# Altium PCB Switchboard V1.PcbDoc
Units mil, origin at the board's own origin, x right, y up, seen from the top; angles counter-clockwise.
Board outline 3833.63 x 7047.24 mil, 2 copper layers (Top Layer, Bottom Layer); 109 components, 103 nets, 516 pads, 2 vias.
Unrouted connection lines stored in the file: 193.
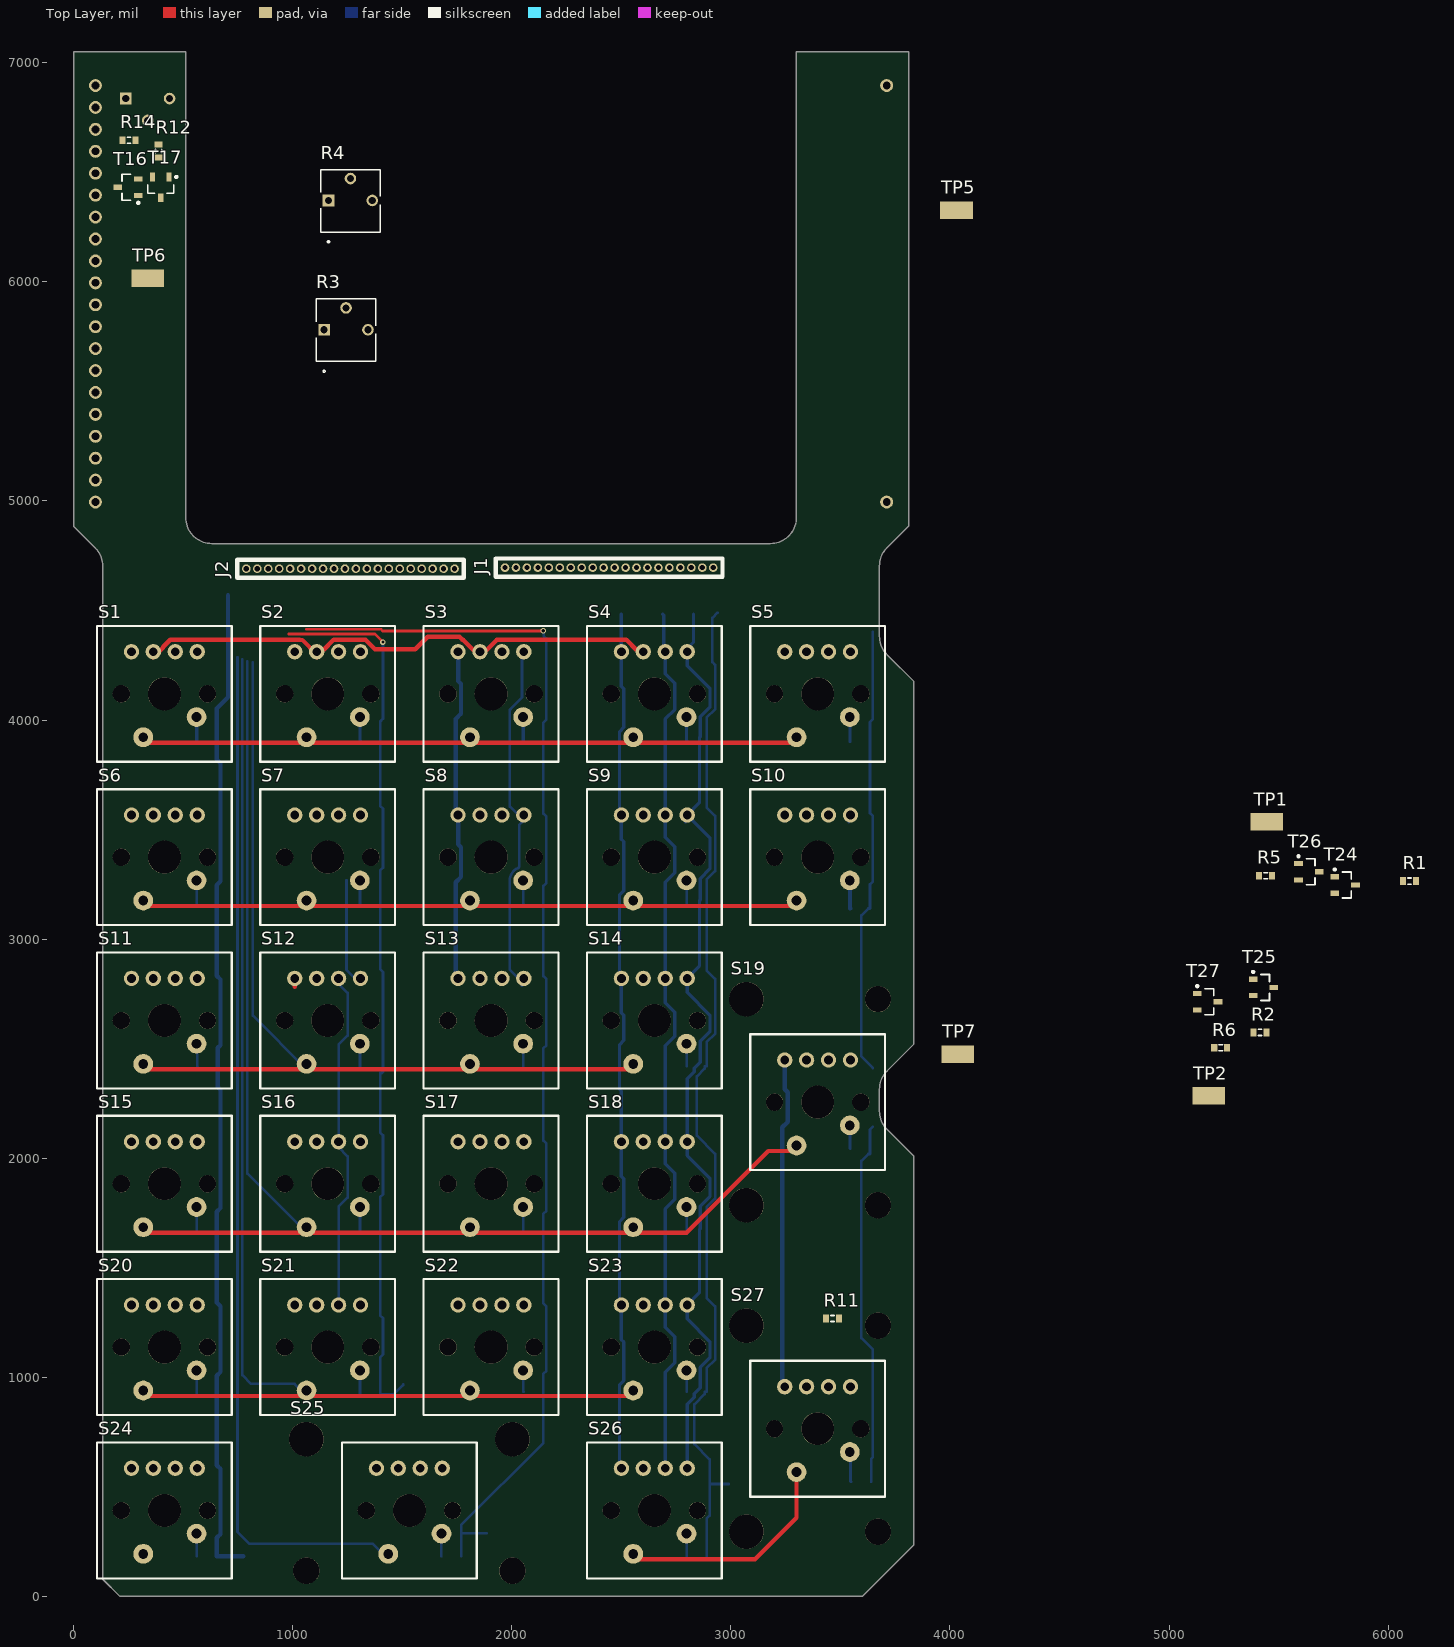
[diagram p0: Top Layer view]
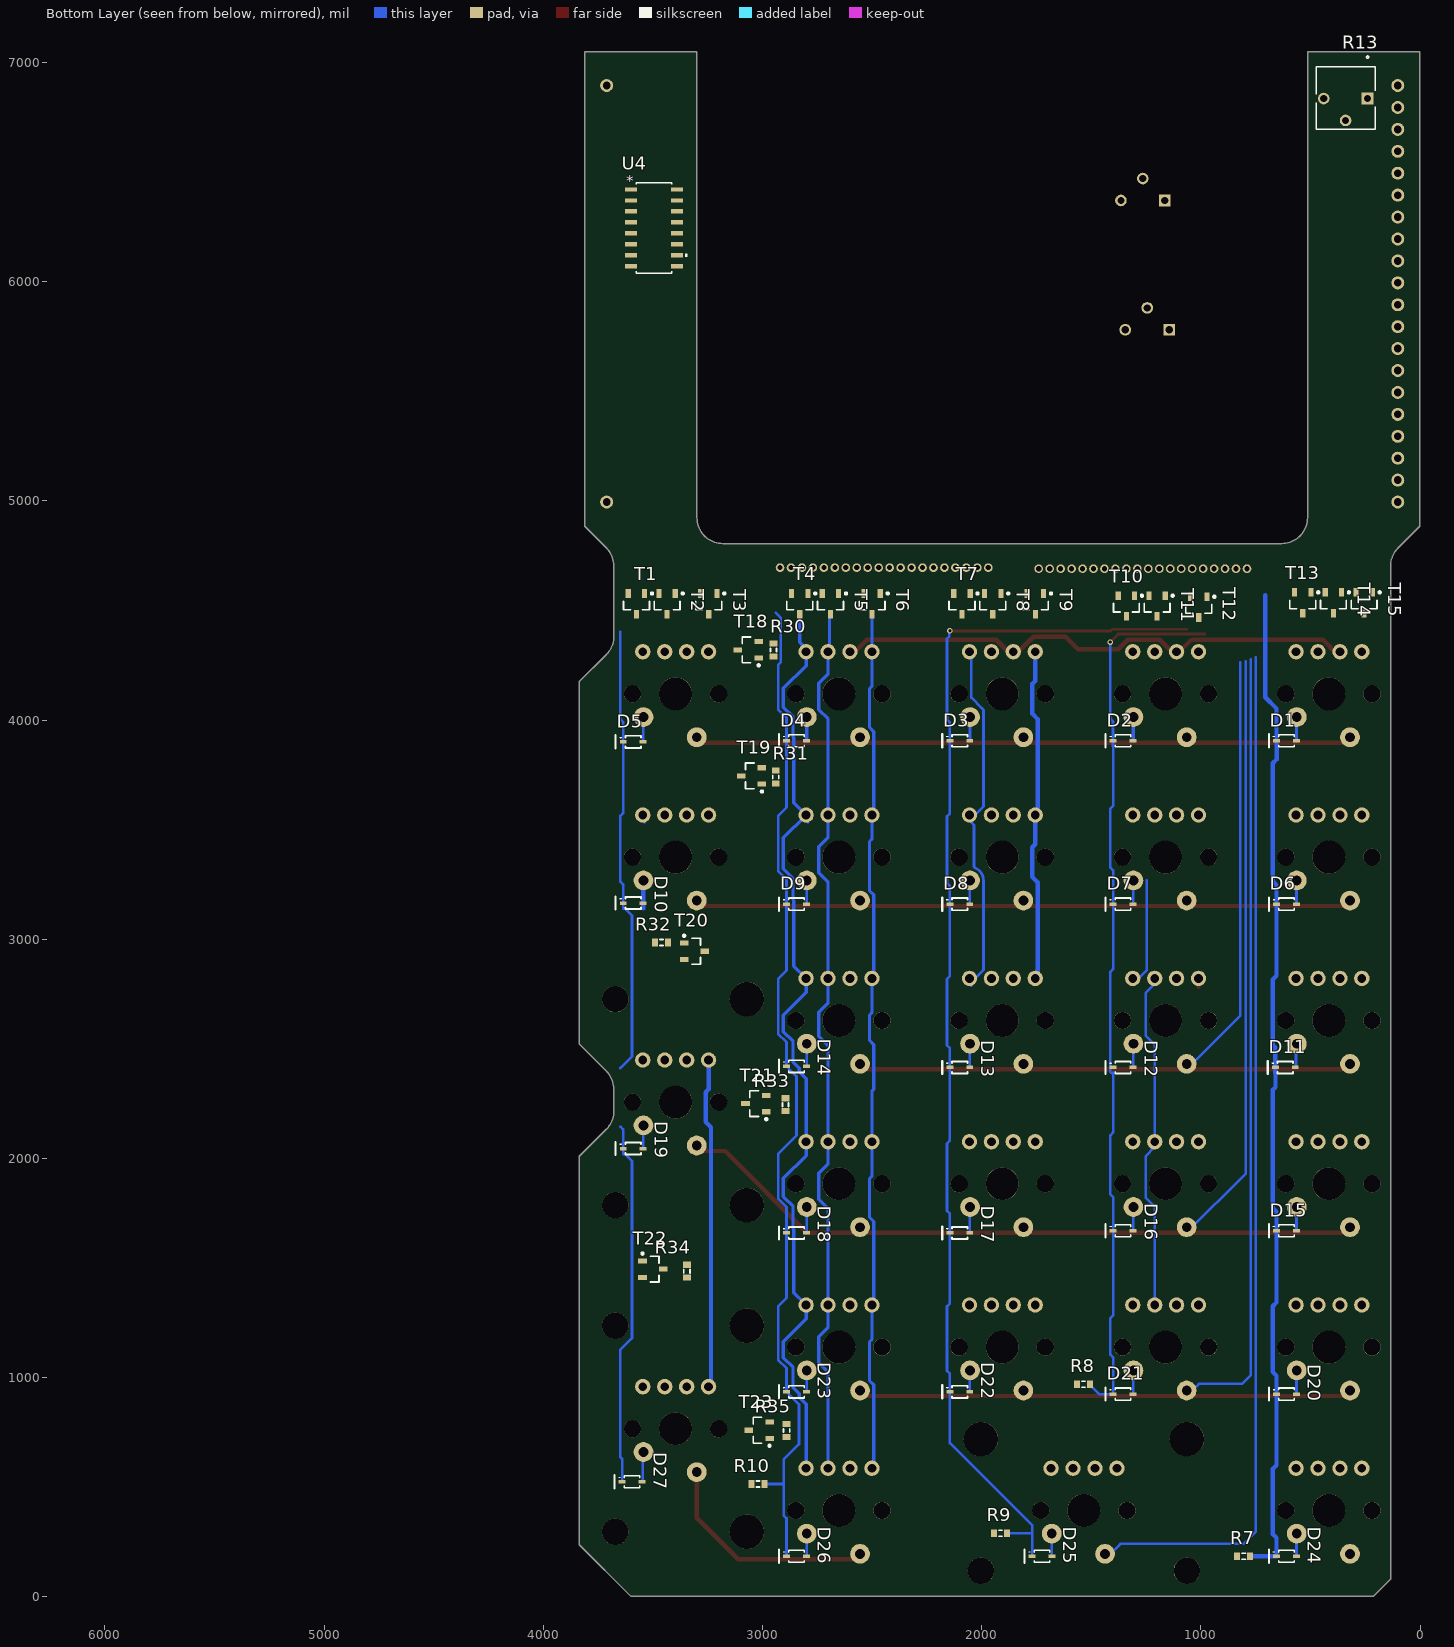
[diagram p1: Bottom Layer view, seen from below]

## Layer stack, top to bottom
Top Solder: solder mask 0.4, Solder Resist, Dk 3.5
Top Layer: signal copper 1.4
Dielectric 1: dielectric 12.6, FR-4, Dk 4.8
Bottom Layer: signal copper 1.4
Bottom Solder: solder mask 0.4, Solder Resist, Dk 3.5

## Board outline
134.81,80.71 134.81,4702.09 ccw(c16.7,4702.09) 100.22,4785.61 1.97,4883.86 1.97,7049.21 513.78,7049.21 513.78,4923.23 ccw(c631.89,4923.23) 631.89,4805.12 3181.05,4805.12 ccw(c3181.05,4923.23) 3299.16,4923.23 3299.16,7049.21 3810.97,7049.21 3810.97,4883.86 3712.72,4785.61 ccw(c3796.23,4702.09) 3678.12,4702.09 3678.12,4381.6 ccw(c3796.23,4381.6) 3712.72,4298.08 3835.6,4175.2 3835.6,2521.65 3712.72,2398.77 ccw(c3796.23,2315.25) 3678.12,2315.25 3678.12,2216.25 ccw(c3796.23,2216.25) 3712.72,2132.73 3835.6,2009.84 3835.6,238.19 3599.38,1.97 213.56,1.97

## Design rules (kind name [scope] priority, off if disabled: settings)
Clearance [All] p1: gap=10 ignorepadtopadclearanceinfootprint=FALSE except(0: Arc-Hole Track-Hole SMDPad-Hole THPad-Hole Via-Hole Fill-Hole Poly-Hole Region-Hole Text-Hole)
PolygonConnect [All] p1: connectstyle=Relief reliefconductorwidth=10 reliefentries=4 polygonreliefangle="90 Angle" airgapwidth=10
RoutingVias [All] p1: holewidth=15 width=25 viastyle="Through Hole" minholewidth=10 minwidth=20 maxholewidth=30 maxwidth=50
SolderMaskExpansion [All] p1: expansion=4 istentingtop=FALSE
Width [All] p1: maxlimit=100 minlimit=6 preferedwidth=10
30 further rules are at their usual default settings.

## Classes and differential pairs
net class "LED Red Ca[4..0]": "LED Red Ca0" "LED Red Ca1" "LED Red Ca2" "LED Red Ca3" "LED Red Ca4"
net class "LED Green Ca[4..0]": "LED Green Ca0" "LED Green Ca1" "LED Green Ca2" "LED Green Ca3" "LED Green Ca4"
net class "LED Blue Ca[4..0]": "LED Blue Ca0" "LED Blue Ca1" "LED Blue Ca2" "LED Blue Ca3" "LED Blue Ca4"
net class SWL[4..0]: SWL0 SWL1 SWL2 SWL3 SWL4
net class SWH[5..0]: SWH0 SWH1 SWH2 SWH3 SWH4 SWH5
net class LS[14..0]: LS0 LS1 LS2 LS3 LS4 LS5 LS6 LS7 LS8 LS9 LS10 LS11 LS12 LS13 LS14
net class "LED An[5..0]": "LED An0" "LED An1" "LED An2" "LED An3" "LED An4" "LED An5"
net class HS[5..0]: HS0 HS1 HS2 HS3 HS4 HS5
net class AHS[2..0]: AHS0 AHS1 AHS2
component class Connectors: J1 J2

## Components (designator, comment, footprint, x,y, rotation, side; value= is the part's Value field where it differs from the comment)
D1 "C2128 Diode" "C2128 SOD323" 610,3905.09 r180 bottom locked
D2 "C2128 Diode" "C2128 SOD323" 1355,3905.09 r180 bottom locked
D3 "C2128 Diode" "C2128 SOD323" 2100,3905.09 r180 bottom locked
D4 "C2128 Diode" "C2128 SOD323" 2845,3905.09 r180 bottom locked
D5 "C2128 Diode" "C2128 SOD323" 3590,3900.09 r180 bottom locked
D6 "C2128 Diode" "C2128 SOD323" 610,3160.09 r180 bottom locked
D7 "C2128 Diode" "C2128 SOD323" 1355,3160.09 r180 bottom locked
D8 "C2128 Diode" "C2128 SOD323" 2100,3160.09 r180 bottom locked
D9 "C2128 Diode" "C2128 SOD323" 2845,3160.09 r180 bottom locked
D10 "C2128 Diode" "C2128 SOD323" 3590,3165.09 r180 bottom locked
D11 "C2128 Diode" "C2128 SOD323" 615,2415.09 r180 bottom locked
D12 "C2128 Diode" "C2128 SOD323" 1355,2415.09 r180 bottom locked
D13 "C2128 Diode" "C2128 SOD323" 2100,2415.09 r180 bottom locked
D14 "C2128 Diode" "C2128 SOD323" 2845,2420.09 r180 bottom locked
D15 "C2128 Diode" "C2128 SOD323" 610,1670.09 r180 bottom locked
D16 "C2128 Diode" "C2128 SOD323" 1355,1670.09 r180 bottom locked
D17 "C2128 Diode" "C2128 SOD323" 2100,1660.09 r180 bottom locked
D18 "C2128 Diode" "C2128 SOD323" 2845,1660.09 r180 bottom locked
D19 "C2128 Diode" "C2128 SOD323" 3590,2045.09 r180 bottom locked
D20 "C2128 Diode" "C2128 SOD323" 610,925.09 r180 bottom locked
D21 "C2128 Diode" "C2128 SOD323" 1355,925.09 r180 bottom locked
D22 "C2128 Diode" "C2128 SOD323" 2100,935.09 r180 bottom locked
D23 "C2128 Diode" "C2128 SOD323" 2845,935.09 r180 bottom locked
D24 "C2128 Diode" "C2128 SOD323" 610,185.09 r180 bottom locked
D25 "C2128 Diode" "C2128 SOD323" 1725,185.09 r180 bottom locked
D26 "C2128 Diode" "C2128 SOD323" 2845,185.09 r180 bottom locked
D27 "C2128 Diode" "C2128 SOD323" 3595,525.09 r180 bottom locked
J1 "20 pos header" "20 pos header" 1970,4695 r90 top
J2 "20 pos header" "20 pos header" 790,4690 r90 top
R1 "Res3" J1-0603 6095.47,3265 r0 top value=1K
R2 "Res3" J1-0603 5414.53,2575 r0 top value=1K
R3 "3362P-1-101LF" POT_3362P 1145,5780 r0 top
R4 "3362P-1-101LF" POT_3362P 1165,6370 r0 top
R5 "Res3" J1-0603 5440,3290 r0 top value=1K
R6 "Res3" J1-0603 5235,2505 r0 top value=1K
R7 "Res3" J1-0603 805,185 r0 bottom value=1K
R8 "Res3" J1-0603 1535,970 r0 bottom value=1K
R9 "Res3" J1-0603 1915,290 r0 bottom value=1K
R10 "Res3" J1-0603 3020,515 r0 bottom value=1K
R11 "Res3" J1-0603 3464.53,1270 r180 top value=1K
R12 "Res3" J1-0603 390,6595 r90 top value=1K
R13 "3362P-1-101LF" POT_3362P 240,6835 r0 bottom
R14 "Res3" J1-0603 255,6645 r0 top value=1K
R30 "Res3" J1-0603 2950,4320 r270 bottom value=1K
R31 "Res3" J1-0603 2940,3740 r270 bottom value=1K
R32 "Res3" J1-0603 3460,2985 r180 bottom value=1K
R33 "Res3" J1-0603 2895,2245 r270 bottom value=1K
R34 "Res3" J1-0603 3345,1485.47 r90 bottom value=1K
R35 "Res3" J1-0603 2890,759.53 r270 bottom value=1K
S1 "Gateron w/ RGB LED" "Gateron Green" 416.47,4119.38 r0 top locked
S2 "Gateron w/ RGB LED" "Gateron Green" 1161.47,4119.38 r0 top locked
S3 "Gateron w/ RGB LED" "Gateron Green" 1906.47,4119.38 r0 top locked
S4 "Gateron w/ RGB LED" "Gateron Green" 2651.47,4119.38 r0 top locked
S5 "Gateron w/ RGB LED" "Gateron Green" 3396.47,4119.38 r0 top locked
S6 "Gateron w/ RGB LED" "Gateron Green" 416.47,3374.38 r0 top locked
S7 "Gateron w/ RGB LED" "Gateron Green" 1161.47,3374.38 r0 top locked
S8 "Gateron w/ RGB LED" "Gateron Green" 1906.47,3374.38 r0 top locked
S9 "Gateron w/ RGB LED" "Gateron Green" 2651.47,3374.38 r0 top locked
S10 "Gateron w/ RGB LED" "Gateron Green" 3396.47,3374.38 r0 top locked
S11 "Gateron w/ RGB LED" "Gateron Green" 416.47,2629.38 r0 top locked
S12 "Gateron w/ RGB LED" "Gateron Green" 1161.47,2629.38 r0 top locked
S13 "Gateron w/ RGB LED" "Gateron Green" 1906.47,2629.38 r0 top locked
S14 "Gateron w/ RGB LED" "Gateron Green" 2651.47,2629.38 r0 top locked
S15 "Gateron w/ RGB LED" "Gateron Green" 416.47,1884.38 r0 top locked
S16 "Gateron w/ RGB LED" "Gateron Green" 1161.47,1884.38 r0 top locked
S17 "Gateron w/ RGB LED" "Gateron Green" 1906.47,1884.38 r0 top locked
S18 "Gateron w/ RGB LED" "Gateron Green" 2651.47,1884.38 r0 top locked
S19 "Gateron w/ RGB LED" "Gateron Green W/ Stabilizer vertical" 3396.47,2256.88 r0 top locked
S20 "Gateron w/ RGB LED" "Gateron Green" 416.47,1139.38 r0 top locked
S21 "Gateron w/ RGB LED" "Gateron Green" 1161.47,1139.38 r0 top locked
S22 "Gateron w/ RGB LED" "Gateron Green" 1906.47,1139.38 r0 top locked
S23 "Gateron w/ RGB LED" "Gateron Green" 2651.47,1139.38 r0 top locked
S24 "Gateron w/ RGB LED" "Gateron Green" 416.47,394.38 r0 top locked
S25 "Gateron w/ RGB LED" "Gateron Green W/ Stabilizer horizontal" 1533.97,394.38 r0 top locked
S26 "Gateron w/ RGB LED" "Gateron Green" 2651.47,394.38 r0 top locked
S27 "Gateron w/ RGB LED" "Gateron Green W/ Stabilizer vertical" 3396.47,766.88 r0 top locked
T1 "C344010 NCH MOS" "C6749 NPN BJT" 3575,4530 r270 bottom
T2 "C344010 NCH MOS" "C6749 NPN BJT" 3435,4530 r270 bottom
T3 "C344010 NCH MOS" "C6749 NPN BJT" 3245,4530 r270 bottom
T4 "C344010 NCH MOS" "C6749 NPN BJT" 2830,4530 r270 bottom
T5 "C344010 NCH MOS" "C6749 NPN BJT" 2690,4530 r270 bottom
T6 "C344010 NCH MOS" "C6749 NPN BJT" 2500,4530 r270 bottom
T7 "C344010 NCH MOS" "C6749 NPN BJT" 2090,4530 r270 bottom
T8 "C344010 NCH MOS" "C6749 NPN BJT" 1950,4530 r270 bottom
T9 "C344010 NCH MOS" "C6749 NPN BJT" 1755,4530 r270 bottom
T10 "C344010 NCH MOS" "C6749 NPN BJT" 1340,4520 r270 bottom
T11 "C344010 NCH MOS" "C6749 NPN BJT" 1200,4520 r270 bottom
T12 "C344010 NCH MOS" "C6749 NPN BJT" 1010,4515 r270 bottom
T13 "C344010 NCH MOS" "C6749 NPN BJT" 535.83,4535 r270 bottom
T14 "C344010 NCH MOS" "C6749 NPN BJT" 395.83,4535 r270 bottom
T15 "C344010 NCH MOS" "C6749 NPN BJT" 255.83,4535 r270 bottom
T16 "C6749 NPN BJT" "C6749 NPN BJT" 250,6430 r180 top
T17 "C6749 NPN BJT" "C6749 NPN BJT" 400,6430 r270 top
T18 "C15127 PCH MOS" "C6749 NPN BJT" 3065,4320 r0 bottom
T19 "C15127 PCH MOS" "C6749 NPN BJT" 3050,3745 r0 bottom
T20 "C15127 PCH MOS" "C6749 NPN BJT" 3310,2945 r180 bottom
T21 "C15127 PCH MOS" "C6749 NPN BJT" 3030,2250 r0 bottom
T22 "C15127 PCH MOS" "C6749 NPN BJT" 3500,1495 r180 bottom
T23 "C15127 PCH MOS" "C6749 NPN BJT" 3015,760 r0 bottom
T24 "C6749 NPN BJT" "C6749 NPN BJT" 5802.24,3247.4 r0 top
T25 "C6749 NPN BJT" "C6749 NPN BJT" 5430,2780 r0 top
T26 "C6749 NPN BJT" "C6749 NPN BJT" 5637.24,3307.6 r0 top
T27 "C6749 NPN BJT" "C6749 NPN BJT" 5175,2715 r0 top
TP1 "5019" KSTN-5019_V 5445,3535 r0 top
TP2 "5019" KSTN-5019_V 5180,2285 r0 top
TP5 "5019" KSTN-5019_V 4030,6325 r0 top
TP6 "5019" KSTN-5019_V 340,6015 r0 top
TP7 "5019" KSTN-5019_V 4035,2475 r0 top
U4 "74HC138" SOIC16 3495,6245 r180 bottom

## Footprints (in the part's own frame and the unit in brackets; to place one, negate y for a bottom-side part, rotate by r counter-clockwise, add the part's x,y. Pads: shape width x height; smd on the part's side, far side on the other; paste and mask are expansions set on the pad)
"20 pos header" [mm] "50mil pitch single row"
  round 1 hole 0.6: 1(0,0) 2(0,-1.27) 3(0,-2.54) 4(0,-3.81) 5(0,-5.08) 6(0,-6.35) 7(0,-7.62) 8(0,-8.89) 9(0,-10.16) 10(0,-11.43) 11(0,-12.7) 12(0,-13.97) 13(0,-15.24) 14(0,-16.51) 15(0,-17.78) 16(0,-19.05) 17(0,-20.32) 18(0,-21.59) 19(0,-22.86) 20(0,-24.13)
  silkscreen extent -1.05,-25.19 1.05,1.06, body extent -1.05,-24.75 1.05,0.65, height 3.3
"C2128 SOD323" [mm] "SODFL, 2-Leads, Body 1.30x2.50mm, IPC Medium Density"
  rect 0.8x0.4 smd: 1(1.15,0) 2(-1.15,0)
  silkscreen extent -2.03,-0.76 0.9,0.76, body extent -0.9,-0.7 0.9,0.7, height 1.1
"C6749 NPN BJT" [mm] "SOT23, 3-Leads, Body 2.90x2.45mm, Pitch 0.95mm, IPC Medium Density"
  rect 1x0.6 smd: 1(-1.2,0.95) 2(-1.2,-0.95) 3(1.2,0)
  silkscreen extent -1.32,-1.5 0.7,1.92, body extent -0.7,-1.5 0.7,1.5, height 1.1
"Gateron Green" [mil]
  round 70 hole 40: 1(-150.51,192.01) 2(-50.51,192.01) 3(49.49,192.01) 4(149.5,192)
  round 90 hole 45: 5(-96.5,-198) 6(146.5,-105.99)
  round 78.74 hole 78.74: ""(-196.5,0) ""(196.5,0)
  round 150 hole 150: ""(0,0)
  silkscreen extent -308,-310 307,310, body extent -307,-307 307,307, height 608
"Gateron Green W/ Stabilizer horizontal" [mil] "1x2 cherry screw in stabilizer"
  round 70 hole 40: 1(-150.51,192.01) 2(-50.51,192.01) 3(49.49,192.01) 4(149.5,192)
  round 90 hole 45: 5(-96.5,-198) 6(146.5,-105.99)
  round 120 hole 120 unplated: 10(-470,-275) 10(470,-275)
  round 157.01 hole 157 unplated: 10(-470,325) 10(470,325)
  round 78.74 hole 78.74: ""(-196.5,0) ""(196.5,0)
  round 150 hole 150: ""(0,0)
  silkscreen extent -308,-310 308,310, body extent -307,-307 307,307, height 608
"Gateron Green W/ Stabilizer vertical" [mil] "1x2 cherry screw in stabilizer"
  round 70 hole 40: 1(-150.51,192.01) 2(-50.51,192.01) 3(49.49,192.01) 4(149.5,192)
  round 90 hole 45: 5(-96.5,-198) 6(146.5,-105.99)
  round 157.01 hole 157 unplated: 10(-325,-470) 10(-325,470)
  round 120 hole 120 unplated: 10(275,-470) 10(275,470)
  round 78.74 hole 78.74: ""(-196.5,0) ""(196.5,0)
  round 150 hole 150: ""(0,0)
  silkscreen extent -308,-310 308,310, body extent -307,-307 307,307, height 608
J1-0603 [mm] "Chip Resistor, Body 1.6x0.8mm, IPC High Density"
  rect 0.7x0.9 smd: 1(-0.75,0) 2(0.75,0)
  silkscreen extent -0.2,-0.35 0.2,0.35, body extent -0.85,-0.48 0.85,0.48, height 0.9
KSTN-5019_V [mm] "Test Point, 1-Leads, Body 3.81x2.03mm"
  rect 3.8x2.03 smd: 1(0,0)
  body extent -1.9,-1.01 1.9,1.02, height 2.29
POT_3362P [mil]
  rect 53x53 hole 33 mask+0: 1(0,0)
  round 53 hole 33 mask+0: 2(100,100) 3(200,0)
  silkscreen extent -35,-194 235,141, body extent 0,0 10,10, height 10
SOIC16 [mil]
  rect 55.5x20 smd paste+0 mask+0: 1(-104.75,175) 2(-104.75,125) 3(-104.75,75) 4(-104.75,25) 5(-104.75,-25) 6(-104.75,-75) 7(-104.75,-125) 8(-104.75,-175) 9(104.75,-175) 10(104.75,-125) 11(104.75,-75) 12(104.75,-25) 13(104.75,25) 14(104.75,75) 15(104.75,125) 16(104.75,175)
  silkscreen extent -82,-206 152,206, body extent -118,-201 118,201, height 61

## Part data
R1 R2 R5 R6 R7 R8 R9 R10 R11 R12 R14 R30 R31 R32 R33 R34 R35: "Resistor", LatestRevisionDate=29-May-2009, LatestRevisionNote="IPC-7351 Footprint Added.", PackageDescription="Chip Resistor", PackageReference=J1-0603, Published=8-Jun-2000, Publisher="Altium Limited"
R3 R4 R13: "No Description Available", Mfr_Name="Bourns Electronics", Copyright="Copyright (C) 2023 Ultra Librarian. All rights reserved.", Digi-Key_Part_Number_1=3362P-101LF-ND, Manufacturer_Part_Number=3362P-1-101LF, RefDes=RefDes, Type=DEV
S1 S2 S3 S4 S5 S6 S7 S8 S9 S10 S11 S12 S13 S14 S15 S16 S17 S18 S19 S20 S21 S22 S23 S24 S25 S26 S27: library part "Gateron Green"
TP1 TP2 TP5 TP6 TP7: library part CMP-1672-00008-1, "Test Point, 1 Position SMD, RoHS, Tape and Reel", Package Quantity=1000, ComponentLink1Description="Manufacturer URL", ComponentLink1URL=http://www.keyelco.com/, ComponentLink2Description=Datasheet, ComponentLink2URL=http://www.keyelco.com/product-pdf.cfm?p=1357, Contact Plating=Silver, DatasheetVersion=03/2014, Mount="Surface Mount", Mounting Technology="Surface Mount", PackageDescription="1-Pin Surface Mount Device, Body 3.81 x 2.03 mm", PackageReference=5019, Packaging="Tape and Reel", Pins=1, RoHSCompliant=True

## Free pads (board coordinates)
  round 59.05 hole 35.43: 15(101.97,4994.21) 15(101.97,5094.21) 15(101.97,5194.21) 15(101.97,5294.21) 15(101.97,5394.21) 15(101.97,5494.21) 15(101.97,5594.21) 15(101.97,5694.21) 15(101.97,5794.21) 15(101.97,5894.21) 15(101.97,5994.21) 15(101.97,6094.21) 15(101.97,6194.21) 15(101.97,6294.21) 15(101.97,6394.21) 15(101.97,6494.21) 15(101.97,6594.21) 15(101.97,6694.21) 15(101.97,6794.21) 15(101.97,6894.21) 15(3710.97,4994.21) 15(3710.97,6894.21)

## Via types
v1: diameter 25, hole 15, Top Layer to Bottom Layer, 2 vias

## Nets (pads, with @x,y where several pads share a name; then routed paths per layer and width w, separated by ;. In a path a pad name is that pad's centre, name@x,y a point inside that pad or via, vN(x,y) a via of type N, cw(c..) or ccw(c..) an arc to the next point about the centre after c; other vN are vias at no path point)
+5: J1.17 T18.2 T19.2 T20.2 T21.2 T22.2 T23.2 TP7.1 U4.6 U4.16
AHS0: J1.13 U4.1
AHS1: J1.14 U4.2
AHS2: J1.15 U4.3
ALS3: J1.12
En: TP5.1 U4.4
GND: J1.19 J1.20 J2.1 R3.1 R4.1 R5.1 R6.1 R7.2 R8.2 R9.2 R10.2 R11.2 R13.1 R14.1 T17.2 T26.2 T27.2 U4.5 U4.8
HS0: R30.2 T18.1
HS1: R31.2 T19.1
HS2: R32.2 T20.1
HS3: R33.2 T21.1
HS4: R34.2 T22.1
HS5: R35.2 T23.1
"LED An0": S1.2 S2.2 S3.2 S4.2 S5.2 T18.3 | length 2493.1
  Top Layer w20: S1.2@365.96,4286.3 410.96,4331.3 410.96,4334.17 443.18,4366.39 1033.74,4366.39 1035.13,4365 1045.79,4365 1110.96,4299.83 S2.2@1110.96,4295.96 ; S2.2@1110.96,4286.3 S2.2@1110.96,4295.96 ; S4.2@2607.72,4293.06 2579.83,4320.96 2569.17,4320.96 2523.74,4366.39 1933.17,4366.39 1887.74,4320.96 1879.05,4320.96 1862.72,4304.62 1862.72,4293.06 1834.83,4320.96 1824.17,4320.96 1778.74,4366.39 1775.87,4366.39 1762.26,4380 1617.58,4380 1560.58,4323 1377.13,4323 1333.74,4366.39 1188.17,4366.39 1142.74,4320.96 1134.05,4320.96 1110.96,4297.86 S2.2@1110.96,4295.96
"LED An1": S6.2 S7.2 S8.2 S9.2 S10.2 T19.3
"LED An2": S11.2 S12.2 S13.2 S14.2 T20.3
"LED An3": S15.2 S16.2 S17.2 S18.2 S19.2 T21.3
"LED An4": S20.2 S21.2 S22.2 S23.2 T22.3
"LED An5": S24.2 S25.2 S26.2 S27.2 T23.3
"LED Blue Ca0": S1.4 S6.4 S11.4 S15.4 S20.4 S24.4 T13.3
"LED Blue Ca1": S2.4 S7.4 S12.4 S16.4 S21.4 T10.3 | length 498.7
  Bottom Layer w12: 1246.96,3268.48 1246.96,2860.29 S12.4@1310.96,2796.29
"LED Blue Ca2": S3.4 S8.4 S13.4 S17.4 S22.4 S25.4 T7.3 | length 1607.5
  Bottom Layer w12: S13.4@2047.6,2787.92 2055.96,2796.29 1991.96,2860.29 1991.96,3268.48 cw(c2052.96,3268.39) 2029.86,3324.84 2031.48,3326.47 2035,3329.99 2035,3520.33 2055.96,3541.29 1991.96,3605.29 1991.96,4045.49 ccw(c1906.47,4119.38) 1997.69,4052.69 2047.6,4102.6 2047.6,4277.92 S3.4@2055.96,4286.29
"LED Blue Ca3": S4.4 S9.4 S14.4 S18.4 S23.4 S26.4 T4.3 | length 4350.5
  Bottom Layer w12: S9.4@2792.6,3532.92 S9.4@2800.96,3541.29
  Bottom Layer w15: S26.4 2800.96,879.01 2832.97,911.02 2832.97,926.16 2860.46,953.65 2860.46,1046.53 2904.84,1090.91 2904.84,1164.23 2800.96,1268.1 S23.4 2857.03,1387.44 2857.03,1675.21 2860.46,1678.65 2860.46,1781.53 2904.84,1825.91 2904.84,1909.23 2800.96,2013.1 S18.4 2800.96,2364.01 2832.97,2396.02 2832.97,2411.16 2860.46,2438.65 2860.46,2534.03 2904.84,2578.41 2904.84,2654.23 2800.96,2758.1 S14.4 2857.03,2877.44 2857.03,3175.21 2860.46,3178.65 2860.46,3276.53 2904.84,3320.91 2904.84,3462.51 S9.4 2857.03,3622.44 2857.03,3920.21 2860.46,3923.65 2860.46,4014.21 2904.84,4058.58 2904.84,4144.23 2800.96,4248.1 S4.4 2800.96,4326.26 2830,4355.3 T4.3
"LED Blue Ca4": S5.4 S10.4 S19.4 S27.4 T1.3 | length 11.8
  Bottom Layer w12: S10.4@3537.6,3532.92 S10.4@3545.96,3541.29
"LED Green Ca0": S1.3 S6.3 S11.3 S15.3 S20.3 S24.3 T14.3
"LED Green Ca1": S2.3 S7.3 S12.3 S16.3 S21.3 T11.3 | length 1558.8
  Bottom Layer w12: S21.3@1210.96,1306.3 1210.96,1780.09 1252.47,1821.6 1252.47,2009.79 1210.96,2051.3 1210.96,2518.67 1252.47,2560.18 1252.47,2754.79 S12.3@1210.96,2796.3
"LED Green Ca2": S3.3 S8.3 S13.3 S17.3 S22.3 S25.3 T8.3
"LED Green Ca3": S4.3 S9.3 S14.3 S18.3 S23.3 S26.3 T5.3 | length 4079.1
  Bottom Layer w15: T5.3 2694.31,4478.44 2694.31,4318.04 S4.3 2700.96,4210.29 2743.97,4167.28 2743.97,4047.78 2700.96,4004.77 S9.3 2700.96,3465.29 2743.97,3422.28 2743.97,3302.78 2700.96,3259.77 S14.3 2700.96,2710.71 2743.97,2667.7 2743.97,2557.78 2700.96,2514.77 S18.3 2700.96,1975.29 2743.97,1932.28 2743.97,1812.78 2700.96,1769.77 S23.3 2700.96,1230.29 2743.97,1187.28 2743.97,1067.78 2700.96,1024.77 S26.3
"LED Green Ca4": S5.3 S10.3 S19.3 S27.3 T2.3
"LED Red Ca0": S1.1 S6.1 S11.1 S15.1 S20.1 S24.1 T15.3 | length 98.7
  Top Layer w20: S15.1@265.96,2051.3 S15.1@265.96,2064.83 ; S11.1@265.96,2796.3 S11.1@265.96,2809.83 ; S6.1@265.96,3541.3 S6.1@265.96,3554.83
  Bottom Layer w20: S24.1@254.97,585.81 265.96,574.83 S24.1@265.96,561.3 ; S15.1@254.97,2075.81 265.96,2064.83 S15.1@265.96,2051.3
"LED Red Ca1": S2.1 S7.1 S12.1 S16.1 S21.1 T12.3 | length 13.5
  Top Layer w20: 1010.96,2782.77 S12.1@1010.96,2796.3
"LED Red Ca2": S3.1 S8.1 S13.1 S17.1 S22.1 S25.1 T9.3 | length 1530.4
  Top Layer w20: S17.1@1744.97,2075.81 S17.1@1755.96,2064.83
  Bottom Layer w20: S13.1@1744.97,2820.81 1744.97,3259.77 1769.34,3284.14 1769.34,3419.54 1755.96,3432.93 1755.96,3541.3 1755.96,3554.83 1744.97,3565.81 1744.97,4004.77 1769.34,4029.14 1769.34,4164.54 1755.96,4177.93 S3.1@1755.96,4286.3 ; S13.1@1755.96,2796.3 S13.1@1755.96,2809.83
"LED Red Ca3": S4.1 S9.1 S14.1 S18.1 S23.1 S26.1 T6.3 | length 4006.1
  Bottom Layer w15: T6.3 2500.48,4482.28 2500.48,4311.87 S4.1 2500.96,4153.82 2511.84,4142.94 2511.84,3966.64 2492.47,3947.27 2492.47,3574.87 S9.1 2500.96,3456.61 2511.84,3445.72 2511.84,3221.64 2492.47,3202.27 2492.47,2829.87 S14.1 2500.96,2663.82 2511.84,2652.94 2511.84,2538.9 2492.47,2519.53 2492.47,2314.91 2500.96,2306.42 S18.1 2500.96,1918.82 2511.84,1907.94 2511.84,1731.64 2492.47,1712.27 2492.47,1339.87 S23.1 2500.96,1173.82 2511.84,1162.94 2511.84,986.64 2492.47,967.27 2492.47,594.87 S26.1
  Bottom Layer w20: S26.1@2489.97,585.81 2500.96,574.83 S26.1@2500.96,561.3
"LED Red Ca4": S5.1 S10.1 S19.1 S27.1 T3.3 | length 1552.8
  Bottom Layer w20: S19.1@3234.97,2448.31 3245.96,2437.33 3245.96,2423.8 3245.96,2315.43 3259.34,2302.04 3259.34,2166.64 3234.97,2142.27 3234.97,958.31 3245.96,947.33 S27.1@3245.96,933.8 ; S10.1@3245.96,3541.3 S10.1@3245.96,3554.83
LS0: J2.20 T13.1
LS1: J2.19 T10.1
LS2: J2.18 T7.1
LS3: J2.17 T4.1
LS4: J2.16 T1.1
LS5: J2.15 T14.1
LS6: J2.14 T11.1
LS7: J2.13 T8.1
LS8: J2.12 T5.1
LS9: J2.11 T2.1
LS10: J2.10 T15.1
LS11: J2.9 T12.1
LS12: J2.8 T9.1
LS13: J2.7 T6.1
LS14: J2.6 T3.1
NetD1_1: D1.1 S1.6 | length 110.6
  Bottom Layer w15: S1.6 563.84,4012.51 563.84,3987.42 563.84,3905.46 564.22,3905.09 D1.1
  Bottom Layer w20: S1.6@562.96,3988.3 S1.6@563.84,3987.42
NetD2_1: D2.1 S2.6 | length 110.6
  Bottom Layer w15: S2.6 1308.84,4012.51 1308.84,3987.42 1308.84,3905.46 1309.22,3905.09 D2.1
  Bottom Layer w20: S2.6@1307.96,3988.3 S2.6@1308.84,3987.42
NetD3_1: D3.1 S3.6 | length 110.6
  Bottom Layer w15: S3.6 2053.84,4012.51 2053.84,3987.42 2053.84,3905.46 2054.22,3905.09 D3.1
  Bottom Layer w20: S3.6@2052.96,3988.3 S3.6@2053.84,3987.42
NetD4_1: D4.1 S4.6 | length 111.1
  Bottom Layer w15: S4.6 2797.96,3988.3 2797.96,3905.46 2798.34,3905.09 D4.1
  Bottom Layer w20: S4.6@2797.96,3988.3 S4.6@2798.84,3987.42
NetD5_1: D5.1 S5.6 | length 115.3
  Bottom Layer w12: S5.6 3543.84,4012.51 3543.84,3987.42 3543.84,3900.97 D5.1
  Bottom Layer w20: S5.6@3542.96,3988.3 S5.6@3543.84,3987.42
NetD6_1: D6.1 S6.6 | length 110.3
  Bottom Layer w12: S6.6 563.84,3267.51 563.84,3242.42 563.84,3160.97 D6.1
  Bottom Layer w20: S6.6@562.96,3243.3 S6.6@563.84,3242.42
NetD7_1: D7.1 S7.6 | length 110.3
  Bottom Layer w12: S7.6 1308.84,3267.51 1308.84,3242.42 1308.84,3160.97 D7.1
  Bottom Layer w20: S7.6@1307.96,3243.3 S7.6@1308.84,3242.42
NetD8_1: D8.1 S8.6 | length 110.3
  Bottom Layer w12: S8.6 2053.84,3267.51 2053.84,3242.42 2053.84,3160.97 D8.1
  Bottom Layer w20: S8.6@2052.96,3243.3 S8.6@2053.84,3242.42
NetD9_1: D9.1 S9.6 | length 110.3
  Bottom Layer w12: S9.6 2798.84,3267.51 2798.84,3242.42 2798.84,3160.97 D9.1
  Bottom Layer w20: S9.6@2797.96,3243.3 S9.6@2798.84,3242.42
NetD10_1: D10.1 S10.6 | length 104
  Bottom Layer w20: S10.6@3542.96,3243.3 3543.84,3242.42 3543.84,3140.88 3544.72,3140
NetD11_1: D11.1 S11.6 | length 116.8
  Bottom Layer w12: S11.6 566.34,2520.01 566.34,2494.92 566.34,2416.96 568.22,2415.09 D11.1
  Bottom Layer w20: S11.6@562.96,2498.3 S11.6@566.34,2494.92
NetD12_1: D12.1 S12.6 | length 110.3
  Bottom Layer w12: S12.6 1308.84,2522.51 1308.84,2497.42 1308.84,2415.97 D12.1
  Bottom Layer w20: S12.6@1307.96,2498.3 S12.6@1308.84,2497.42
NetD13_1: D13.1 S13.6 | length 110.3
  Bottom Layer w12: S13.6 2053.84,2522.51 2053.84,2497.42 2053.84,2415.97 D13.1
  Bottom Layer w20: S13.6@2052.96,2498.3 S13.6@2053.84,2497.42
NetD14_1: D14.1 S14.6 | length 105.3
  Bottom Layer w12: S14.6 2798.84,2522.51 2798.84,2497.42 2798.84,2420.97 D14.1
  Bottom Layer w20: S14.6@2797.96,2498.3 S14.6@2798.84,2497.42
NetD15_1: D15.1 S15.6 | length 110.3
  Bottom Layer w12: S15.6 563.84,1777.51 563.84,1752.42 563.84,1670.97 D15.1
  Bottom Layer w20: S15.6@562.96,1753.3 S15.6@563.84,1752.42
NetD16_1: D16.1 S16.6 | length 110.3
  Bottom Layer w12: S16.6 1308.84,1777.51 1308.84,1752.42 1308.84,1670.97 D16.1
  Bottom Layer w20: S16.6@1307.96,1753.3 S16.6@1308.84,1752.42
NetD17_1: D17.1 S17.6 | length 120.3
  Bottom Layer w12: S17.6 2053.84,1777.51 2053.84,1752.42 2053.84,1660.97 D17.1
  Bottom Layer w20: S17.6@2052.96,1753.3 S17.6@2053.84,1752.42
NetD18_1: D18.1 S18.6 | length 120.3
  Bottom Layer w12: S18.6 2798.84,1777.51 2798.84,1752.42 2798.84,1660.97 D18.1
  Bottom Layer w20: S18.6@2797.96,1753.3 S18.6@2798.84,1752.42
NetD19_1: D19.1 S19.6 | length 107.8
  Bottom Layer w12: S19.6 3543.84,2150.01 3543.84,2124.92 3543.84,2045.97 D19.1
  Bottom Layer w20: S19.6@3542.96,2125.8 S19.6@3543.84,2124.92
NetD20_1: D20.1 S20.6 | length 110.3
  Bottom Layer w12: S20.6 563.84,1032.51 563.84,1007.42 563.84,925.97 D20.1
  Bottom Layer w20: S20.6@562.96,1008.3 S20.6@563.84,1007.42
NetD21_1: D21.1 S21.6 | length 110.3
  Bottom Layer w12: S21.6 1308.84,1032.51 1308.84,1007.42 1308.84,925.97 D21.1
  Bottom Layer w20: S21.6@1307.96,1008.3 S21.6@1308.84,1007.42
NetD22_1: D22.1 S22.6 | length 100.3
  Bottom Layer w12: S22.6 2053.84,1032.51 2053.84,1007.42 2053.84,935.97 D22.1
  Bottom Layer w20: S22.6@2052.96,1008.3 S22.6@2053.84,1007.42
NetD23_1: D23.1 S23.6 | length 100.3
  Bottom Layer w12: S23.6 2798.84,1032.51 2798.84,1007.42 2798.84,935.97 D23.1
  Bottom Layer w20: S23.6@2797.96,1008.3 S23.6@2798.84,1007.42
NetD24_1: D24.1 S24.6 | length 105.3
  Bottom Layer w12: S24.6 563.84,287.51 563.84,262.42 563.84,185.97 D24.1
  Bottom Layer w20: S24.6@562.96,263.3 S24.6@563.84,262.42
NetD25_1: D25.1 S25.6 | length 104.1
  Bottom Layer w12: D25.1 1680.09,185.46 1680.09,262.93 1680.09,288.02 S25.6
  Bottom Layer w20: S25.6@1680.09,262.93 S25.6@1680.46,263.3
NetD26_1: D26.1 S26.6 | length 105.3
  Bottom Layer w12: S26.6 2798.84,287.51 2798.84,262.42 2798.84,185.97 D26.1
  Bottom Layer w20: S26.6@2797.96,263.3 S26.6@2798.84,262.42
NetD27_1: D27.1 S27.6 | length 144.3
  Bottom Layer w12: S27.6 3546.34,657.51 3546.34,632.42 3546.34,526.96 3548.22,525.09 D27.1
  Bottom Layer w20: S27.6@3542.96,635.8 S27.6@3546.34,632.42
NetR1_1: R1.1 T24.1 T26.3
NetR2_1: R2.1 T25.1 T27.3
NetR3_2: R3.2 R3.3 R5.2 T24.2 T26.1 TP1.1
NetR4_2: R4.2 R4.3 R6.2 T25.2 T27.1 TP2.1
NetR12_1: R12.1 T16.1 T17.3
NetR13_2: R13.2 R13.3 R14.2 T16.2 T17.1 TP6.1
NetR30_1: R30.1 U4.15
NetR31_1: R31.1 U4.14
NetR32_1: R32.1 U4.13
NetR33_1: R33.1 U4.12
NetR34_1: R34.1 U4.11
NetR35_1: R35.1 U4.10
NetT1_2: T1.2 T4.2 T7.2 T10.2 T13.2 T16.3
NetT2_2: T2.2 T5.2 T8.2 T11.2 T14.2 T24.3
NetT3_2: T3.2 T6.2 T9.2 T12.2 T15.2 T25.3
SWH0: J1.11 S1.5 S2.5 S3.5 S4.5 S5.5 | length 2980
  Top Layer w20: S1.5@319.97,3896.29 1064.97,3896.29 1809.97,3896.29 2554.97,3896.29 S5.5@3299.97,3896.29
SWH1: J1.10 S6.5 S7.5 S8.5 S9.5 S10.5 | length 2980
  Top Layer w20: S6.5@319.97,3151.29 1064.97,3151.29 1809.97,3151.29 2554.97,3151.29 S10.5@3299.97,3151.29
SWH2: J1.9 S11.5 S12.5 S13.5 S14.5 | length 4192.4
  Top Layer w20: S11.5@319.97,2406.29 1064.97,2406.29 1809.97,2406.29 S14.5@2554.97,2406.29
  Bottom Layer w12: 820,4262.23 820,2651.26 S12.5@1064.97,2406.29
SWH3: J1.8 S15.5 S16.5 S17.5 S18.5 S19.5 | length 5853.2
  Top Layer w20: S15.5@319.97,1661.29 1064.97,1661.29 1809.97,1661.29 2554.97,1661.29 2797.88,1661.29 3170.38,2033.79 S19.5@3299.97,2033.79
  Bottom Layer w12: 795,4268.34 795,1931.26 S16.5@1064.97,1661.29
SWH4: J1.7 S20.5 S21.5 S22.5 S23.5 | length 5832
  Top Layer w20: S20.5@319.97,916.29 1064.97,916.29 1809.97,916.29 S23.5@2554.97,916.29
  Bottom Layer w12: 772,4276.45 772,1012.03 812.41,971.62 1009.64,971.62 S21.5@1064.97,916.29
SWH5: J1.6 S24.5 S25.5 S26.5 S27.5 | length 5743
  Top Layer w20: S24.5@319.97,171.29 S24.5@322.97,174.29 ; S25.5@1434.47,174.29 S25.5@1437.47,171.29 ; S26.5@2554.97,171.29 3110.27,171.29 3299.97,360.99 S27.5@3299.97,543.79
  Bottom Layer w12: 750,4285.56 750,297.03 805.41,241.62 1367.14,241.62 S25.5@1437.47,171.29
SWL0: D1.2 D6.2 D11.2 D15.2 D20.2 D24.2 J1.1 R7.1 | length 4592.2
  Bottom Layer w20: 706.47,4568.9 706.47,4103.83 655.28,4052.64 655.28,3880 655,3879.72 655,3820 672.34,3802.66 672.34,3264.04 655.28,3246.97 655.28,2833.24 672.34,2816.17 672.34,2516.54 660.28,2504.47 660.28,2390 660,2389.72 660,2325 672.34,2312.66 672.34,1774.04 655.28,1756.97 655.28,1343.05 672.34,1325.99 672.34,1026.16 655.28,1009.1 655.28,600.74 672.34,583.67 672.34,286.54 655.28,269.47 D24.2 655.32,185.05 775.43,185.05 R7.1
SWL1: D2.2 D7.2 D12.2 D16.2 D21.2 J1.2 R8.1 | length 4055.5
  Top Layer w12: 982.98,4392.39 1376.45,4392.39 v1(1413.34,4355.5)
  Bottom Layer w12: v1(1413.34,4355.5) 1413.34,4005.72 1400.99,3993.38 1400.99,3880.72 1400.28,3880 1400.28,3608.77 1413.34,3595.71 1413.34,3326.36 1400.28,3313.29 1400.28,2863.77 1413.34,2850.71 1413.34,2395.19 1408.15,2390 1400.28,2390 1400.28,2118.77 1413.34,2105.71 1413.34,1836.36 1400.28,1823.29 1400.28,1284.63 1413.34,1271.56 1413.34,1105.8 1400.28,1092.73 D21.2 1464.5,925.09 1505.47,966.06 R8.1
SWL2: D3.2 D8.2 D13.2 D17.2 D22.2 D25.2 J1.3 R9.1 | length 5632
  Top Layer w12: 1064.28,4414.39 1403.42,4414.39 1411.81,4406 2143.5,4406 v1(2145,4407.5)
  Bottom Layer w12: D25.2 1770.28,290 ; R9.1 1770.28,290 ; v1(2145,4407.5) 2147.49,4405.01 2147.49,4381.85 2158.34,4371 2158.34,4001.21 2145.28,3988.14 D3.2 2145.28,3573.7 2158.34,3560.64 2158.34,3256.21 2145.28,3243.14 2145.28,2831.14 2158.34,2818.07 2158.34,2516.08 2145.28,2503.02 2145.28,2081.2 2158.34,2068.14 2158.34,1761.21 2145.28,1748.14 2145.28,1338.64 2158.34,1325.57 2158.34,1031.08 2145.28,1018.02 2145.28,701.95 1770.28,326.95 1770.28,290
SWL3: D4.2 D9.2 D14.2 D18.2 D23.2 D26.2 J1.4 R10.1 | length 4653.3
  Bottom Layer w12: D26.2 2890.28,358.38 2903.34,371.45 2903.34,515 ; 2940,4490 2916.28,4466.28 2916.28,4263.59 2928.34,4251.54 2928.34,4048.85 2890.28,4010.79 D4.2 2890.28,3601.23 2928.34,3563.16 2928.34,3311.17 2890.28,3273.11 D9.2 2890.28,2857.48 2928.34,2819.41 2928.34,2568.67 2890.28,2530.61 D14.2 2882.4,2420.09 2880.53,2418.22 2880.53,2410.34 2845,2374.82 2845,2104.47 2928.34,2021.13 2928.34,1816.17 2890.28,1778.11 D18.2 2890.28,1363.73 2928.34,1325.66 2928.34,1081.17 2890.28,1043.11 D23.2 2882.4,935.09 2880.53,933.22 2880.53,925.34 2833.5,878.32 2833.5,696.5 2903.34,626.66 2903.34,515 ; R10.1 2903.34,515
SWL4: D5.2 D10.2 D19.2 D27.2 J1.5 R11.1 | length 3721.5
  Bottom Layer w12: D27.2 3640,525.37 3640,535 3640.28,535.28 3640.28,629.27 3648.34,637.33 3648.34,1127.44 3595.47,1180.31 3595.47,1988.07 3627.4,2020 3635.28,2020 3635.28,2131.77 3648.34,2144.83 ; 3648.34,2412.62 3595.47,2465.49 3595.47,3108.07 3627.4,3140 3635.28,3140 3635.28,3250.52 3648.34,3263.58 3648.34,3561.82 3635.28,3574.89 3635.28,3990.52 3648.34,4003.58 3648.34,4403.14
VBatt: J2.3 J2.4 R1.2 R2.2 R12.2
pads on no net: J1.16 J1.18 J2.2 J2.5 S1. S2. S3. S4. S5. S6. S7. S8. S9. S10. S11. S12. S13. S14. S15. S16. S17. S18. S19. S19.10 S20. S21. S22. S23. S24. S25. S25.10 S26. S27. S27.10 U4.7 U4.9

## Silkscreen, mask and mechanical layers (free items; w line width, h text height)
Mechanical 1:
  circle w3.94: c416.47,394.38 r74.8
  circle w3.94: c101.97,6894.21 r17
  circle w3.94: c3710.97,5894.21 r17
  circle w3.94: c101.97,5794.21 r17
  circle w3.94: c3710.97,5794.21 r17
  circle w3.94: c101.97,5694.21 r17
  circle w3.94: c3710.97,6094.21 r17
  circle w3.94: c101.97,5994.21 r17
  circle w3.94: c3710.97,5994.21 r17
  circle w3.94: c101.97,5894.21 r17
  circle w3.94: c3710.97,5494.21 r17
  circle w3.94: c101.97,5394.21 r17
  circle w3.94: c3710.97,5394.21 r17
  circle w3.94: c101.97,5294.21 r17
  circle w3.94: c3710.97,5694.21 r17
  circle w3.94: c101.97,5594.21 r17
  circle w3.94: c3710.97,5594.21 r17
  circle w3.94: c101.97,5494.21 r17
  circle w3.94: c3710.97,6694.21 r17
  circle w3.94: c101.97,6594.21 r17
  circle w3.94: c3710.97,6594.21 r17
  circle w3.94: c101.97,6494.21 r17
  circle w3.94: c101.97,6794.21 r17
  circle w3.94: c3710.97,6794.21 r17
  circle w3.94: c3710.97,6894.21 r17
  circle w3.94: c101.97,6694.21 r17
  circle w3.94: c3710.97,6294.21 r17
  circle w3.94: c101.97,6194.21 r17
  circle w3.94: c3710.97,6194.21 r17
  circle w3.94: c101.97,6094.21 r17
  circle w3.94: c3710.97,6494.21 r17
  circle w3.94: c101.97,6394.21 r17
  circle w3.94: c3710.97,6394.21 r17
  circle w3.94: c101.97,6294.21 r17
  circle w3.94: c3710.97,5094.21 r17
  circle w3.94: c101.97,4994.21 r17
  circle w3.94: c3710.97,4994.21 r17
  circle w3.94: c3710.97,5294.21 r17
  circle w3.94: c101.97,5194.21 r17
  circle w3.94: c3710.97,5194.21 r17
  circle w3.94: c101.97,5094.21 r17
  lines w3.94: 1.97,4883.86 100.22,4785.61 cw(c16.7,4702.09) 134.81,4702.09 134.81,80.71 213.56,1.97 3599.38,1.97 3835.6,238.19 3835.6,2009.84 3712.72,2132.73 cw(c3796.23,2216.25) 3678.12,2216.25 3678.12,2315.25 cw(c3796.23,2315.25) 3712.72,2398.77 3835.6,2521.65 3835.6,4175.2 3712.72,4298.08 cw(c3796.23,4381.6) 3678.12,4381.6 3678.12,4702.09 cw(c3796.23,4702.09) 3712.72,4785.61 3810.97,4883.86 3810.97,7049.21 3299.16,7049.21 3299.16,4923.23 cw(c3181.05,4923.23) 3181.05,4805.12 631.89,4805.12 cw(c631.89,4923.23) 513.78,4923.23 513.78,7049.21 1.97,7049.21 1.97,4883.86

## Text inside footprints (layer, text, board x,y; h text height)
U4: Mechanical 13 "*" at 3569.5,6393 h50; Bottom Overlay "*" at 3622.25,6435 h50